# EAGLE board ds1804 (EAGLE 6.4)
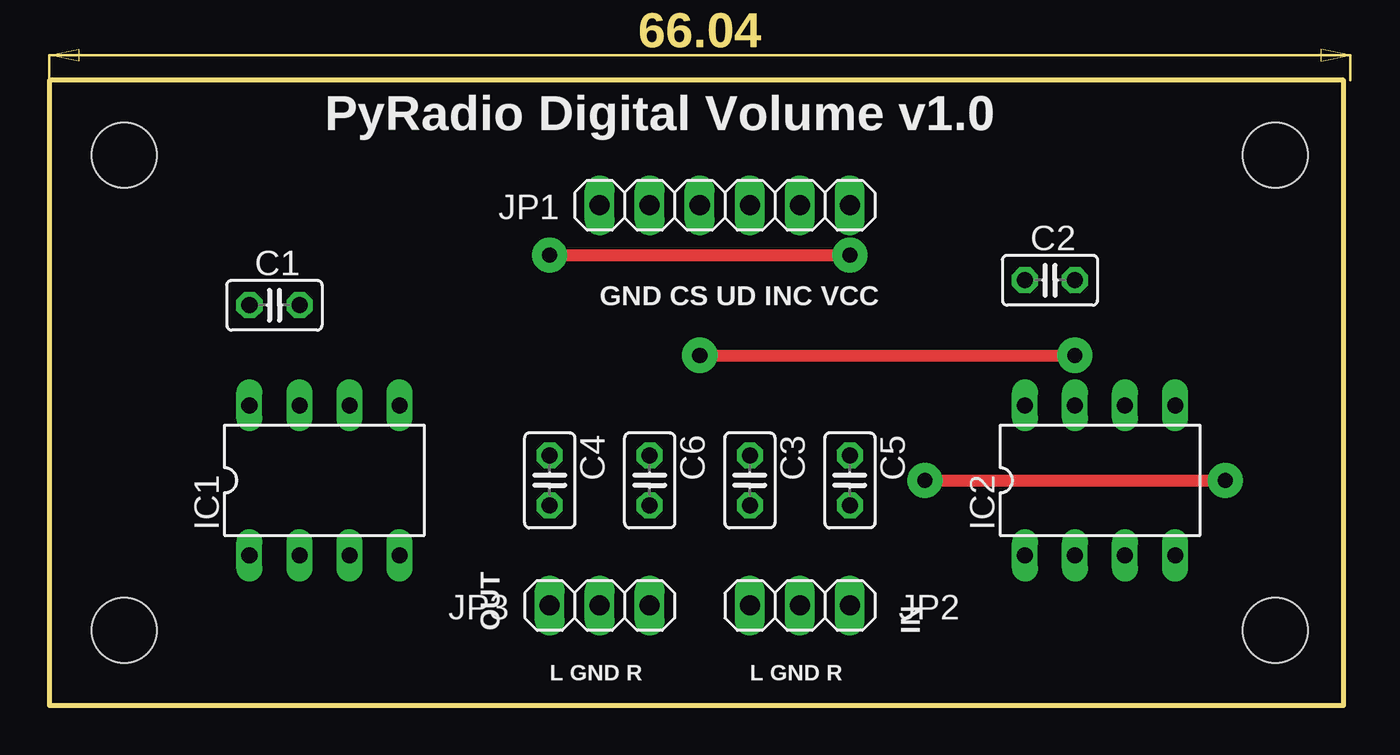
[diagram p0: board, top side]
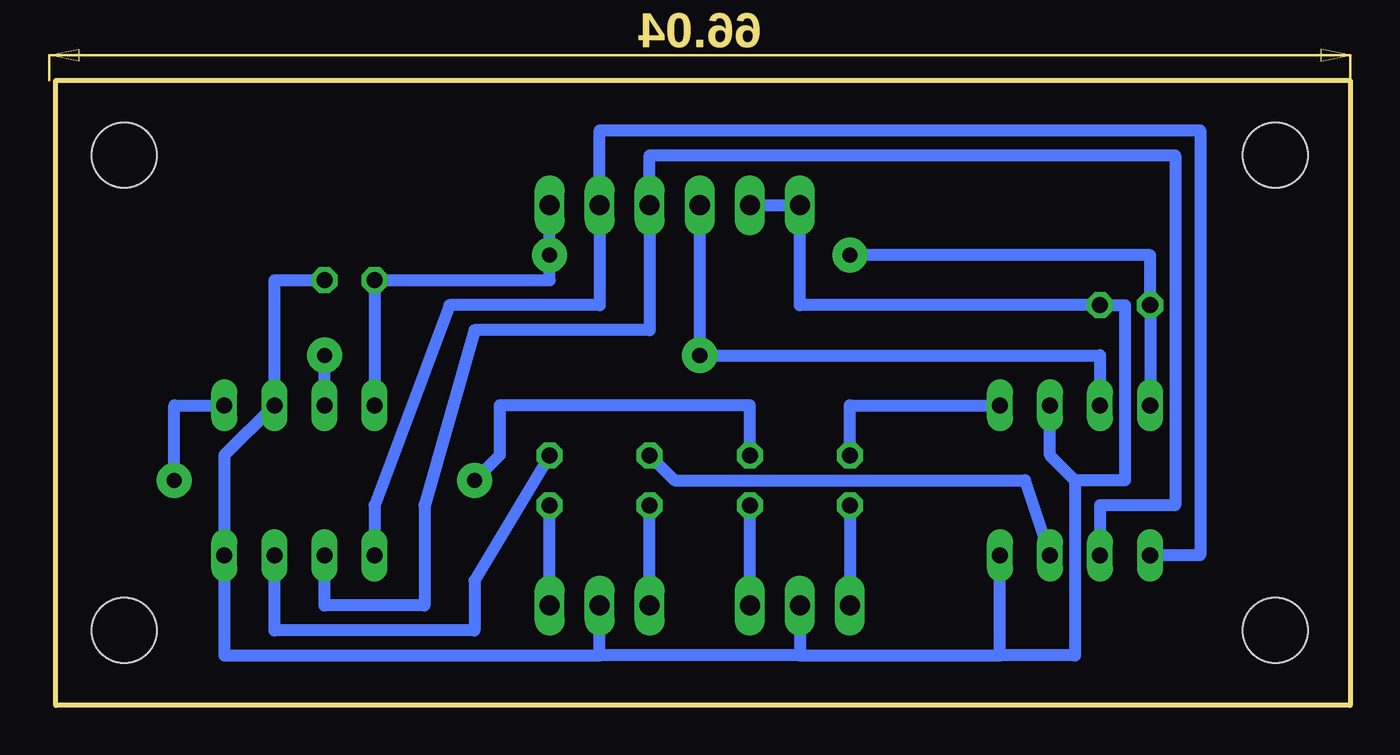
[diagram p1: board, bottom side, seen from below]

Size 65.71 x 31.74 mm. Coordinates in mm from the lower left corner, seen from the top.
Outline: 0,0 65.71,0 65.71,31.74 0,31.74 0,0
Copper layers (1*16): Top 0.035mm / dielectric 1.5mm / Bottom 0.035mm
Design rules "default": minimum track width 10mil, minimum drill 24mil, track to track 8mil, track to pad 8mil, pad to pad 8mil, via to via 8mil, smd to smd 8mil, copper to edge 40mil, drill to drill 8mil, minimum pad ring 10mil, minimum via ring 8mil, stop-mask expansion 4mil, vias tented up to drill 0mil, thermal gap 10mil

## Footprints (pad centres in the part's own frame; a part is rotated, then mirrored left to right if it is on the bottom)
C025-025X050 = drill 0.813 octagon: 1 -1.27,0; 2 1.27,0
DIL08 = drill 0.813 long: 1 -3.81,-3.81; 2 -1.27,-3.81; 3 1.27,-3.81; 4 3.81,-3.81; 5 3.81,3.81; 6 1.27,3.81; 7 -1.27,3.81; 8 -3.81,3.81
1X06 = drill 1.016 long: 1 -6.35,0; 2 -3.81,0; 3 -1.27,0; 4 1.27,0; 5 3.81,0; 6 6.35,0
1X03 = drill 1.016 long: 1 -2.54,0; 2 0,0; 3 2.54,0
STAND-OFF = hole 3.302: 0,0

## Placement (x,y rotation side)
C1  0.1u  [C025-025X050]  11.43,20.32 0 top
C2  0.1u  [C025-025X050]  50.8,21.59 0 top
C3  0.1u  [C025-025X050]  35.56,11.43 270 top
C4  0.1u  [C025-025X050]  25.4,11.43 270 top
C5  0.1u  [C025-025X050]  40.64,11.43 270 top
C6  0.1u  [C025-025X050]  30.48,11.43 270 top
FRAME1  FRAME-LETTER  [CREATIVE_COMMONS]  1.27,33.02 0 top
IC1  DS1804-100  [DIL08]  13.97,11.43 0 top
IC2  DS1804-100  [DIL08]  53.34,11.43 0 top
JP1  DIGITAL VOLUME  [1X06]  34.29,25.4 0 top
JP2  IN  [1X03]  38.1,5.08 0 top
JP3  OUT  [1X03]  27.94,5.08 0 top
STANDOFF1  STAND-OFF  [STAND-OFF]  62.23,3.81 0 top
STANDOFF2  STAND-OFF  [STAND-OFF]  3.81,3.81 0 top
STANDOFF3  STAND-OFF  [STAND-OFF]  3.81,27.94 0 top
STANDOFF4  STAND-OFF  [STAND-OFF]  62.23,27.94 0 top

## Library data of the parts
C1 C2 = rcl
C3-C6 = resistor
FRAME1 = SparkFun-Aesthetics
IC1 IC2 = ds1804; OC_FARNELL: unknown; OC_NEWARK: unknown
JP1-JP3 = pinhead
STANDOFF1-STANDOFF4 = SparkFun-Electromechanical

## Nets
CS: IC1.7 IC2.7 JP1.3
GND: C1.2 C2.2 IC1.4 IC1.6 IC2.4 IC2.6 JP1.1 JP1.2 JP2.2 JP3.2
INC: IC1.1 IC2.1 JP1.5
L_IN: C3.2 JP2.1
L_OUT: C4.2 JP3.1
N$5: C5.1 IC2.3
N$6: C6.1 IC2.5
N$7: C3.1 IC1.3
N$9: C4.1 IC1.5
R_IN: C5.2 JP2.3
R_OUT: C6.2 JP3.3
UD: IC1.2 IC2.2 JP1.4
VCC: C1.1 C2.1 IC1.8 IC2.8 JP1.6

## Tracks (layer width: path | path; a pad name or v marks a point on that pad's centre or on a via)
CS  (via drill 0.76 pad 1.78)
  Top 0.61: v33.02,17.78 v52.07,17.78
  Bottom 0.61: IC1.7 12.7,17.78 v33.02,17.78 JP1.3 | IC2.7 v52.07,17.78
GND
  Bottom 0.61: C2.2 54.61,21.59 IC2.6 57.15,12.7 IC2.4 57.15,2.54 38.1,2.54 | 38.1,2.54 JP2.2 | 27.94,2.54 17.78,2.54 | 17.78,2.54 IC1.4 | JP1.2 JP1.1 27.94,20.32 C1.2 11.43,20.32 11.43,11.43 13.97,11.43 | 13.97,11.43 15.24,12.7 IC1.6 | JP3.2 27.94,2.54 | 27.94,2.54 38.1,2.54 | 13.97,11.43 13.97,2.54 17.78,2.54
INC
  Bottom 0.61: IC1.1 7.62,7.62 7.62,29.21 38.1,29.21 JP1.5 38.1,20.32 45.72,20.32 49.53,10.16 IC2.1
L_IN
  Bottom 0.61: JP2.1 C3.2
L_OUT
  Bottom 0.61: C4.2 JP3.1
N$5
  Bottom 0.61: IC2.3 54.61,3.81 44.45,3.81 44.45,6.35 C5.1
N$6  (via drill 0.76 pad 1.78)
  Top 0.61: v44.45,11.43 v59.69,11.43
  Bottom 0.61: C6.1 30.48,15.24 43.18,15.24 43.18,12.7 v44.45,11.43 | v59.69,11.43 59.69,15.24 IC2.5
N$7
  Bottom 0.61: IC1.3 16.51,11.43 34.29,11.43 C3.1
N$9
  Bottom 0.61: C4.1 25.4,15.24 IC1.5
R_IN
  Bottom 0.61: JP2.3 C5.2
R_OUT
  Bottom 0.61: JP3.3 C6.2
UD
  Bottom 0.61: IC1.2 12.7,10.16 8.89,10.16 8.89,27.94 35.56,27.94 JP1.4 35.56,19.05 44.45,19.05 46.99,10.16 46.99,5.08 52.07,5.08 IC2.2
VCC  (via drill 0.76 pad 1.78)
  Top 0.61: v25.4,22.86 v40.64,22.86
  Bottom 0.61: IC2.8 C2.1 40.64,21.59 v40.64,22.86 JP1.6 | IC1.8 C1.1 10.16,22.86 v25.4,22.86

## Text on the board
tPlace: PyRadio Digital Volume v1.0 | GND CS UD INC VCC | IN | OUT | L GND R | L GND R